# Altium PCB PCB1.PcbDoc
Units mil, origin at the board's own origin, x right, y up, seen from the top; angles counter-clockwise.
Board outline 300 x 195 mil, 2 copper layers (Top Layer, Bottom Layer); 3 components, 3 nets, 11 pads, 6 vias.
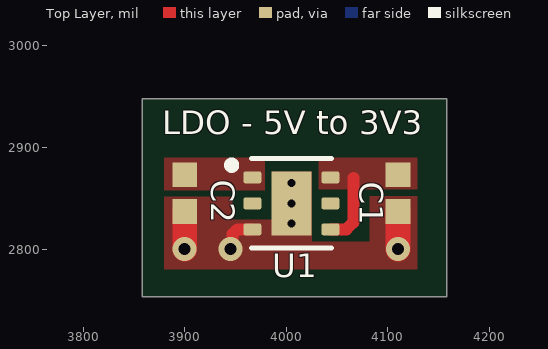
[diagram p0: Top Layer view]
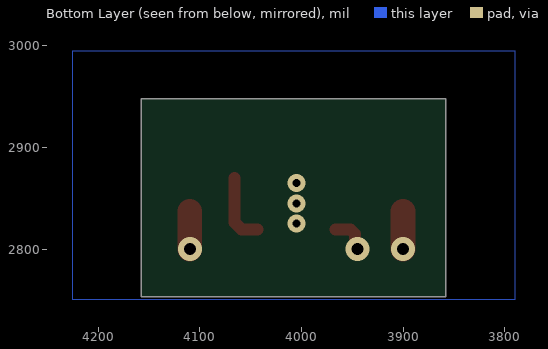
[diagram p1: Bottom Layer view, seen from below]
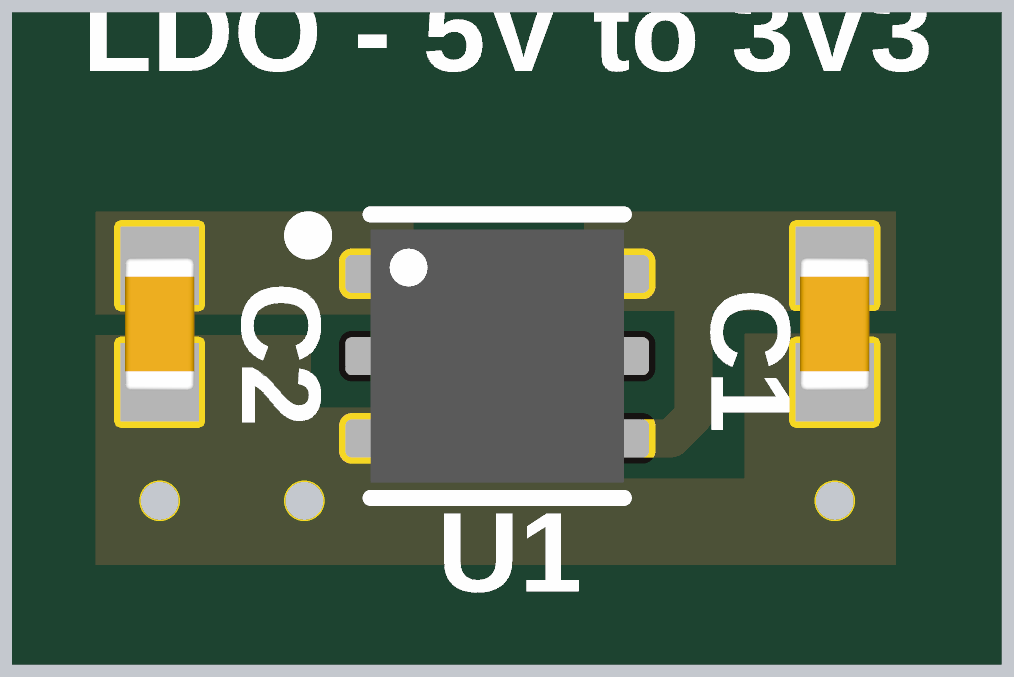
[diagram p2: 3D render of the assembled board from above, using the file's embedded part models]

## Layer stack, top to bottom
Top Solder: solder mask 0.4, Solder Resist, Dk 3.5
Top Layer: signal copper 1.4
Dielectric 1: dielectric 12.6, FR-4, Dk 4.8
Bottom Layer: signal copper 1.4
Bottom Solder: solder mask 0.4, Solder Resist, Dk 3.5

## Board outline
3858,2753 3858,2948 4158,2948 4158,2753

## Design rules (kind name [scope] priority, off if disabled: settings)
Clearance [All] p1: gap=5.98 ignorepadtopadclearanceinfootprint=TRUE except(4.72: Arc-Arc Arc-Track Arc-SMDPad Arc-THPad Track-Track Track-SMDPad Track-THPad; 6.69: SMDPad-SMDPad; 9.84: Arc-Hole Track-Hole SMDPad-Hole THPad-Hole Via-Hole Fill-Hole Poly-Hole Region-Hole Text-Hole)
ComponentClearance [All] p1: gap=4.02 collisioncheckmode=3 verticalgap=4 showdistances=FALSE
DiffPairsRouting DIFF90 [InDifferentialPairClass('All Differential Pairs')] p1: maxlimit=8 minlimit=5 mostfreqgap=8 toplayer_mingap=8 toplayer_minwidth=6.23 toplayer_maxwidth=6.23 toplayer_prefwidth=6.23 bottomlayer_maxgap=5 bottomlayer_prefgap=5 bottomlayer_minwidth=4.92 bottomlayer_maxwidth=4.92 bottomlayer_prefwidth=4.92 maxuncoupledlength=500
HoleSize [All] p1: absolutevalues=TRUE maxlimit=248.03 minlimit=7.87 maxpercent=80.000 minpercent=20.000
HoleToHoleClearance [All] p1: gap=18.11 allowstackedmicrovias=TRUE
MinimumSolderMaskSliver [All] p1: minsoldermaskwidth=3.15
PlaneConnect [All] p1: pad.planeconnectstyle=Relief pad.reliefexpansion=20 pad.reliefentries=4 pad.reliefconductorwidth=20 pad.reliefairgap=10 via.planeconnectstyle=Direct via.reliefexpansion=20 via.reliefentries=4 via.reliefconductorwidth=20 via.reliefairgap=10
PolygonConnect [All] p1: connectstyle=Direct reliefconductorwidth=3.94 reliefentries=4 polygonreliefangle="90 Angle" airgapwidth=3.94
RoutingVias "General Vias" [All] p1: holewidth=11.81 width=23.62 viastyle="Through Hole" minholewidth=7.87 minwidth=17.72 maxholewidth=248.03 maxwidth=253.94 useviatemplates=TRUE viatemplateguid#1={A55298F7-F443-40A1-B02A-F45C1F13C1AA} viatemplatename#1=v60h30m0mx0
SilkToSilkClearance [All] p1: silktosilkclearance=5.91
SilkToSolderMaskClearance [IsPad] p1: minsilkscreentomaskgap=5.51 clearancetoexposedcopper=TRUE
SolderMaskExpansion [All] p1: expansion=1.5 istentingtop=FALSE
SupplyNets "Schematic Supply Nets_2" [InNet('3V3')] p1: voltage=0.000
SupplyNets "Schematic Supply Nets_1" [InNet('5V')] p2: voltage=0.000
SupplyNets "Schematic Supply Nets" [InNet('GND')] p3: voltage=0.000
UnRoutedNet [All] p1: checkbadconnections=TRUE
Width [All] p1: maxlimit=196.85 minlimit=4.72 preferedwidth=9.84
21 further rules are at their usual default settings.

## Components (designator, comment, footprint, x,y, rotation, side; value= is the part's Value field where it differs from the comment)
C1 "4.7uF" CAP_0402 4110,2855 r270 top
C2 "4.7uF" CAP_0402 3900,2855 r90 top
U1 "TLV75533PDRVR" TLV75533PDRVR 4005,2845 r0 top

## Footprints (in the part's own frame and the unit in brackets; to place one, negate y for a bottom-side part, rotate by r counter-clockwise, add the part's x,y. Pads: shape width x height; smd on the part's side, far side on the other; paste and mask are expansions set on the pad)
CAP_0402 [mm] "Chip Capacitor, 2-Leads, Body 1.00x0.50mm, IPC Medium Density"
  rect 0.62x0.62 smd mask+0.05: 1(-0.46,0) 2(0.46,0)
  body extent -0.53,-0.28 0.53,0.28, height 0.55
TLV75533PDRVR [mm]
  rrect35% 0.45x0.3 smd mask+0.05: 1(-0.975,0.65) 2(-0.975,0) 3(-0.975,-0.65) 4(0.975,-0.65) 5(0.975,0) 6(0.975,0.65)
  rect 1x1.6 smd paste-2 mask+0.05: 7(0,0)
  silkscreen extent -1.58,-1.12 1,1.12, body extent -1,-1 1,1, height 0.8

## Part data
C1 C2: library part CAP_0402, "Capacitor SMD 0402 Generic, X5R or X7R"
U1: "500mA high-PSRR low-IQ low-dropout voltage regulator with enable 6-WSON -40 to 125", Dropout Voltage=250mV, Manufacturer="Texas Instruments", Manufacturer Lifecycle Status=ACTIVE, Max Junction Temperature (Tj)=125°C, Max Supply Voltage=5.5V, Min Operating Temperature=-40°C, Min Supply Voltage=3.55V, Nominal Supply Current=25µA, Output Current=500mA, Output Voltage=3.3V, Supplier Part Number=296-51807-6-ND, Accuracy=1.5%, Category="LDO Voltage Regulators", ComponentLink1Description=https://octopart.com:443/opatz8j6/c1?t=jz4KQYd-X30Q9oOq83RN8Q7LJxgnjgc-4qjjpnbq5ibPyNQ9C1qmgU9l-Mq4lcrjrxNSMc1fBezVCBvvAiMb2CiEwv4XU2kB3ULQci-AKl7rOna3sWz9khra6j3WMNF6umiBxhVnqs4fyYOWhNE2PFYe70JvyT66uIYe3PcBjJPV9rj2Op8s1nt1envjIjZVUY3LrhuEoL_oMCW_bmLoi1tQcpU6eGEV6lKc3ncBfJmEddXZsDRyU__fld6n-joR3AORBvJ_Vc3OVQhCrkfV5BDSB_Me-qjpyqejgDWvRq9frsyj1H2Z_N5iwNIFVTUaM6S0AsYGC3S5REzTpAfo67I7hxePwPhy6LENuZ1lk9DMUkgUFbrXIbVKEpYMLRYkCMjcSg&src-supplier=Texas+Instruments, ComponentLink1URL=https://octopart.com:443/opatz8j6/c1?t=jz4KQYd-X30Q9oOq83RN8Q7LJxgnjgc-4qjjpnbq5ibPyNQ9C1qmgU9l-Mq4lcrjrxNSMc1fBezVCBvvAiMb2CiEwv4XU2kB3ULQci-AKl7rOna3sWz9khra6j3WMNF6umiBxhVnqs4fyYOWhNE2PFYe70JvyT66uIYe3PcBjJPV9rj2Op8s1nt1envjIjZVUY3LrhuEoL_oMCW_bmLoi1tQcpU6eGEV6lKc3ncBfJmEddXZsDRyU__fld6n-joR3AORBvJ_Vc3OVQhCrkfV5BDSB_Me-qjpyqejgDWvRq9frsyj1H2Z_N5iwNIFVTUaM6S0AsYGC3S5REzTpAfo67I7hxePwPhy6LENuZ1lk9DMUkgUFbrXIbVKEpYMLRYkCMjcSg&src-supplier=Texas+Instruments, ComponentLink2Description=https://sigma.octopart.com:443/101810328/technical_drawing/Texas-Instruments-TLV75533PDRVR.pdf?src-supplier=Texas+Instruments, ComponentLink2URL=https://sigma.octopart.com:443/101810328/technical_drawing/Texas-Instruments-TLV75533PDRVR.pdf?src-supplier=Texas+Instruments, ComponentLink3Description=https://datasheet.octopart.com:443/TLV75533PDRVR-Texas-Instruments-datasheet-148775085.pdf?src-supplier=Upverter, ComponentLink3URL=https://datasheet.octopart.com:443/TLV75533PDRVR-Texas-Instruments-datasheet-148775085.pdf?src-supplier=Upverter, ComponentLink4Description=https://datasheet.octopart.com:443/TLV75533PDRVR-Texas-Instruments-datasheet-150455022.pdf?src-supplier=Augswan, ComponentLink4URL=https://datasheet.octopart.com:443/TLV75533PDRVR-Texas-Instruments-datasheet-150455022.pdf?src-supplier=Augswan, ComponentLink5Description=https://datasheet.octopart.com:443/TLV75533PDRVR-Texas-Instruments-datasheet-165804640.pdf?src-supplier=LCSC, ComponentLink5URL=https://datasheet.octopart.com:443/TLV75533PDRVR-Texas-Instruments-datasheet-165804640.pdf?src-supplier=LCSC, ComponentLink6Description=http://sigma.octopart.com:80/reach_statement/Texas-Instruments-company-64.pdf?src-supplier=Compliance+Statements, ComponentLink6URL=http://sigma.octopart.com:80/reach_statement/Texas-Instruments-company-64.pdf?src-supplier=Compliance+Statements, ComponentLink7Description=http://sigma.octopart.com:80/conflict_mineral_statement/Texas-Instruments-company-63.pdf?src-supplier=Compliance+Statements, ComponentLink7URL=http://sigma.octopart.com:80/conflict_mineral_statement/Texas-Instruments-company-63.pdf?src-supplier=Compliance+Statements, Height=800µm, Length=2mm, Lifecycle Status=Production, Manufacturer Part Number=TLV75533PDRVR, Max Operating Temperature=125°C, Number of Channels=1, Number of Outputs=1, Pins=6, Pricing="1=0.45, 10=0.311, 25=0.2772, 100=0.24, 250=0.22232, 500=0.21166, 1000=0.20288 (USD)", RoHS=Compliant, Schedule B=8542390000, Stock=5358, Supplier=DigiKey, Thickness=750µm, Width=2mm

## Via types
v1: diameter 23.62, hole 11.81, Top Layer to Bottom Layer, tented both sides, 3 vias
v2: diameter 17.72, hole 7.87, Top Layer to Bottom Layer, tented both sides, 3 vias

## Nets (pads, with @x,y where several pads share a name; then routed paths per layer and width w, separated by ;. In a path a pad name is that pad's centre, name@x,y a point inside that pad or via, vN(x,y) a via of type N, cw(c..) or ccw(c..) an arc to the next point about the centre after c; other vN are vias at no path point)
3V3: C2.2 U1.1
5V: C1.1 U1.4 U1.6 | length 69.2
  Top Layer w11.81: U1.4 4059.08,2819.41 4066,2826.33 4066,2870
GND: C1.2 C2.1 U1.3 U1.7 | length 110.8
  Top Layer w11.81: v1(3945,2800) 3947.26,2802.26 3947.26,2814.75 3951.92,2819.41 U1.3
  Top Layer w24.41: v1(3900,2800) C2.1 ; v1(4110,2800) C1.2
  other v2: 4005,2825 4005,2845 4005,2865
pads on no net: U1.2 U1.5

## Polygon pours and split planes (outlines as drawn)
5V on Top Layer "NONET_L-01_P-001" (solid, pour order 2): 4032,2890 4129,2890 4129,2859 4032,2859
GND on Top Layer "NONET_L-01_P-001" (solid, pour order 6): 3880,2852 3947,2852 3947,2829 3986,2829 3986,2876 4025,2876 4025,2807 4082,2807 4082,2852 4129,2852 4129,2780 3880,2780
3V3 on Top Layer "NONET_L-01_P-001" (solid, pour order 1): 3880,2890 3979,2890 3979,2858 3880,2858
GND on Bottom Layer "NONET_L02_P000" (solid, shelved, pour order 0): 3790,2750 4225,2750 4225,2995 3790,2995

## Silkscreen, mask and mechanical layers (free items; w line width, h text height)
Top Overlay:
  text "LDO - 5V to 3V3" at 3878,2905 h40
Board Shape:
  the board outline again, w7.87